# Altium PCB StepCounter_LCD.PcbDoc
Units mm, origin at the board's own origin, x right, y up, seen from the top; angles counter-clockwise.
Board outline 90.93 x 66.29 mm, 2 copper layers (Top Layer, Bottom Layer); 24 components, 24 nets, 105 pads, 19 vias.
Unrouted connection lines stored in the file: 1.
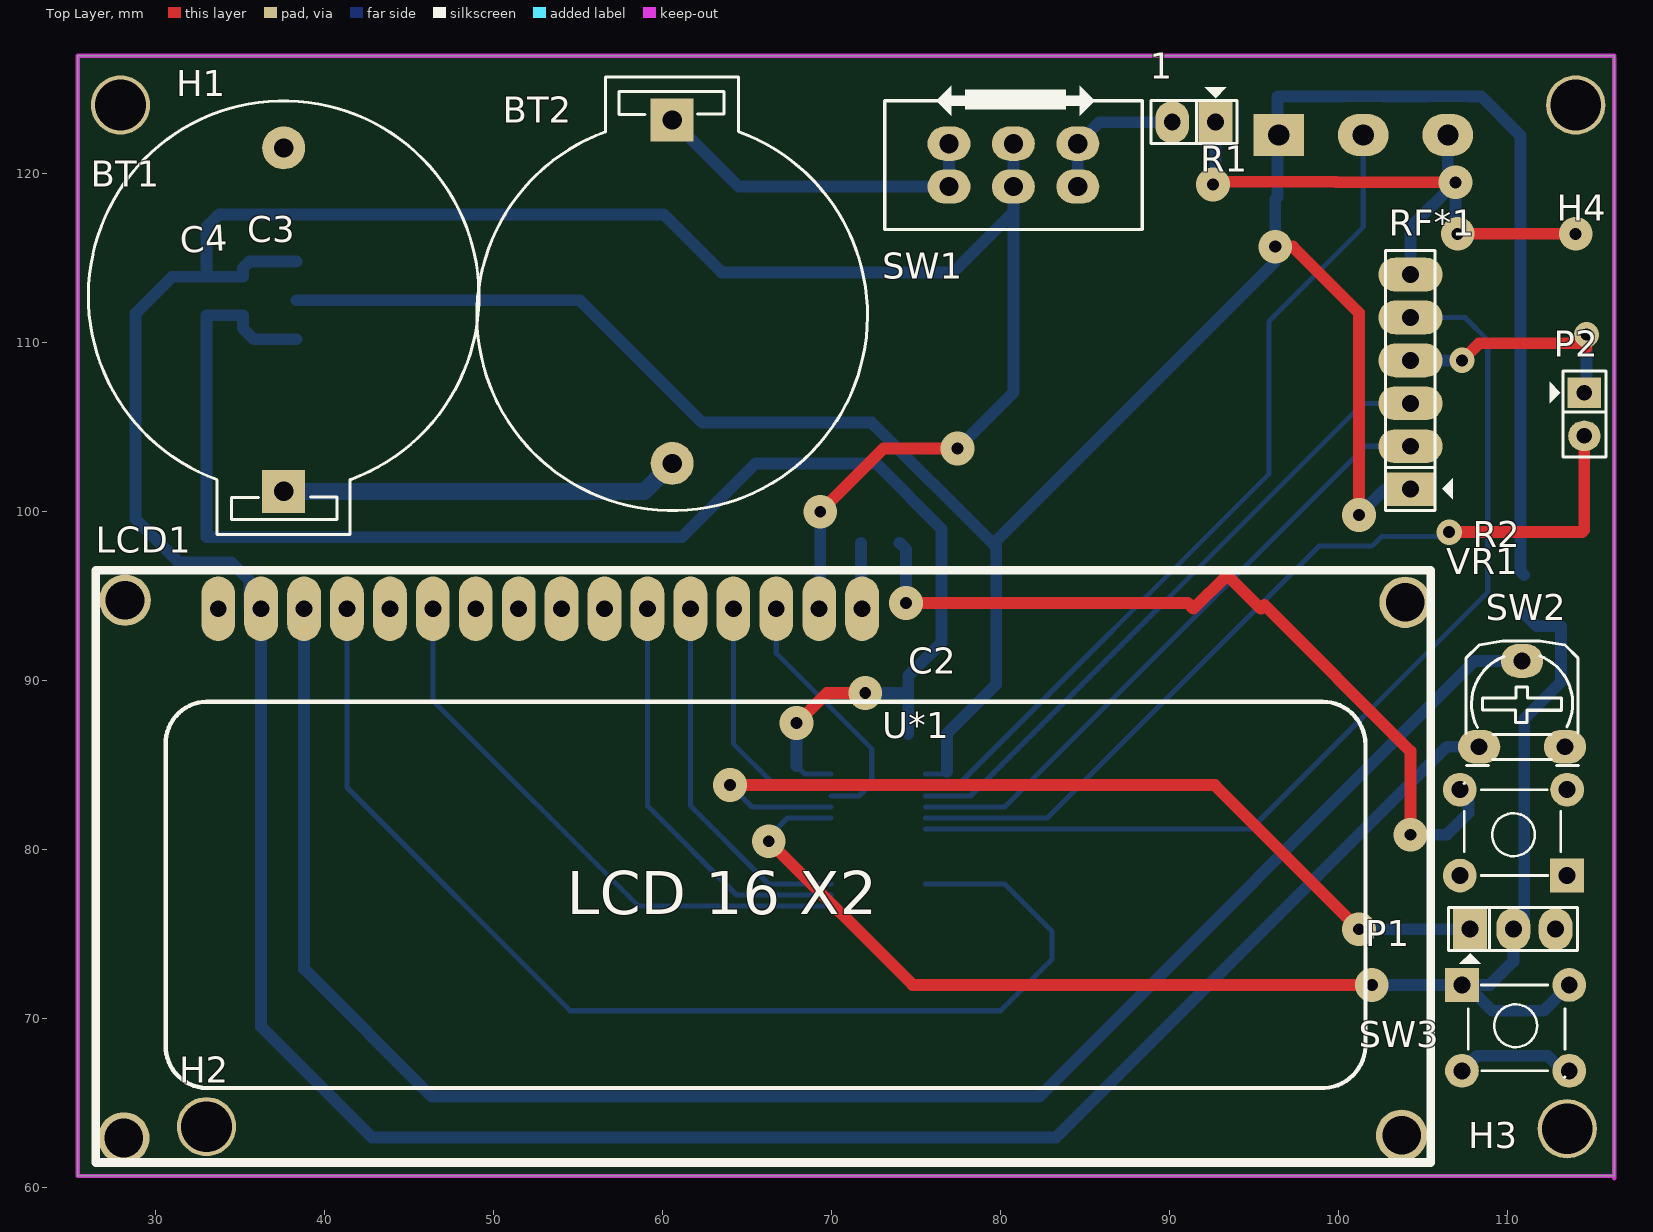
[diagram p0: Top Layer view]
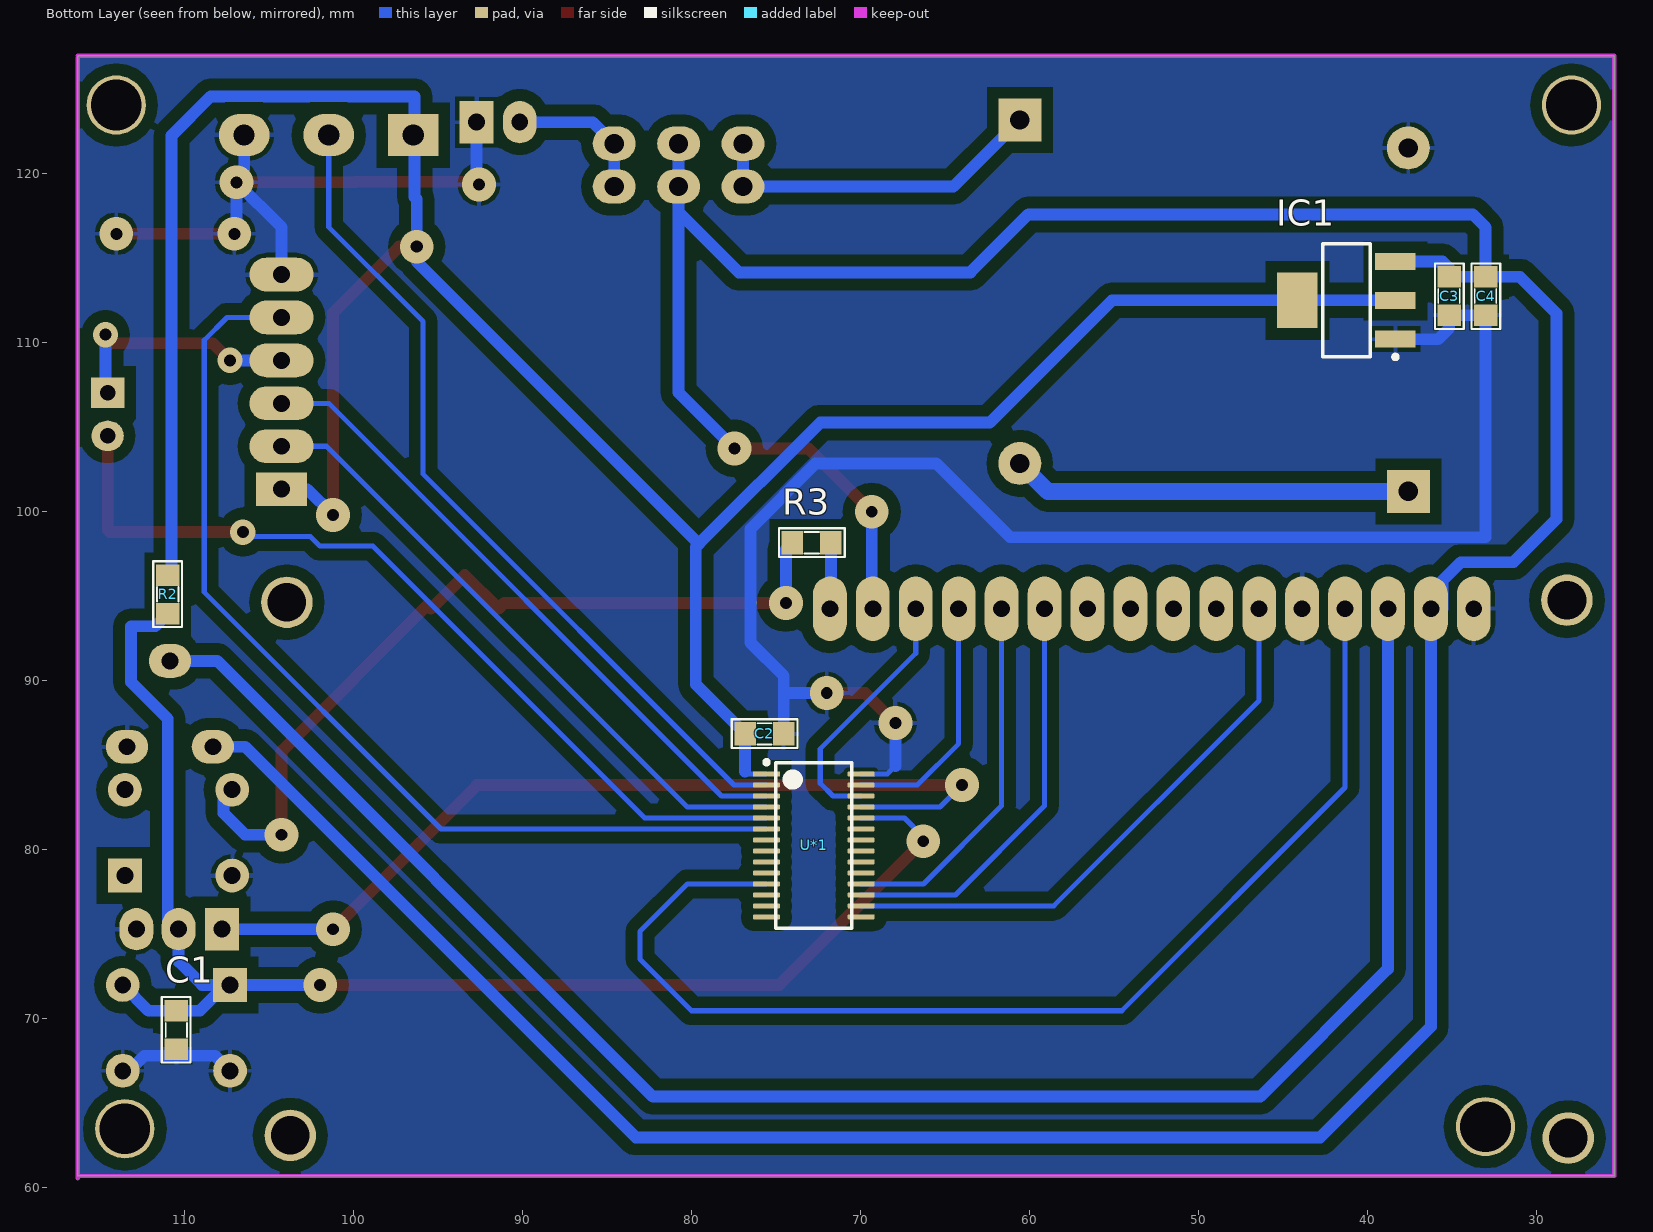
[diagram p1: Bottom Layer view, seen from below]
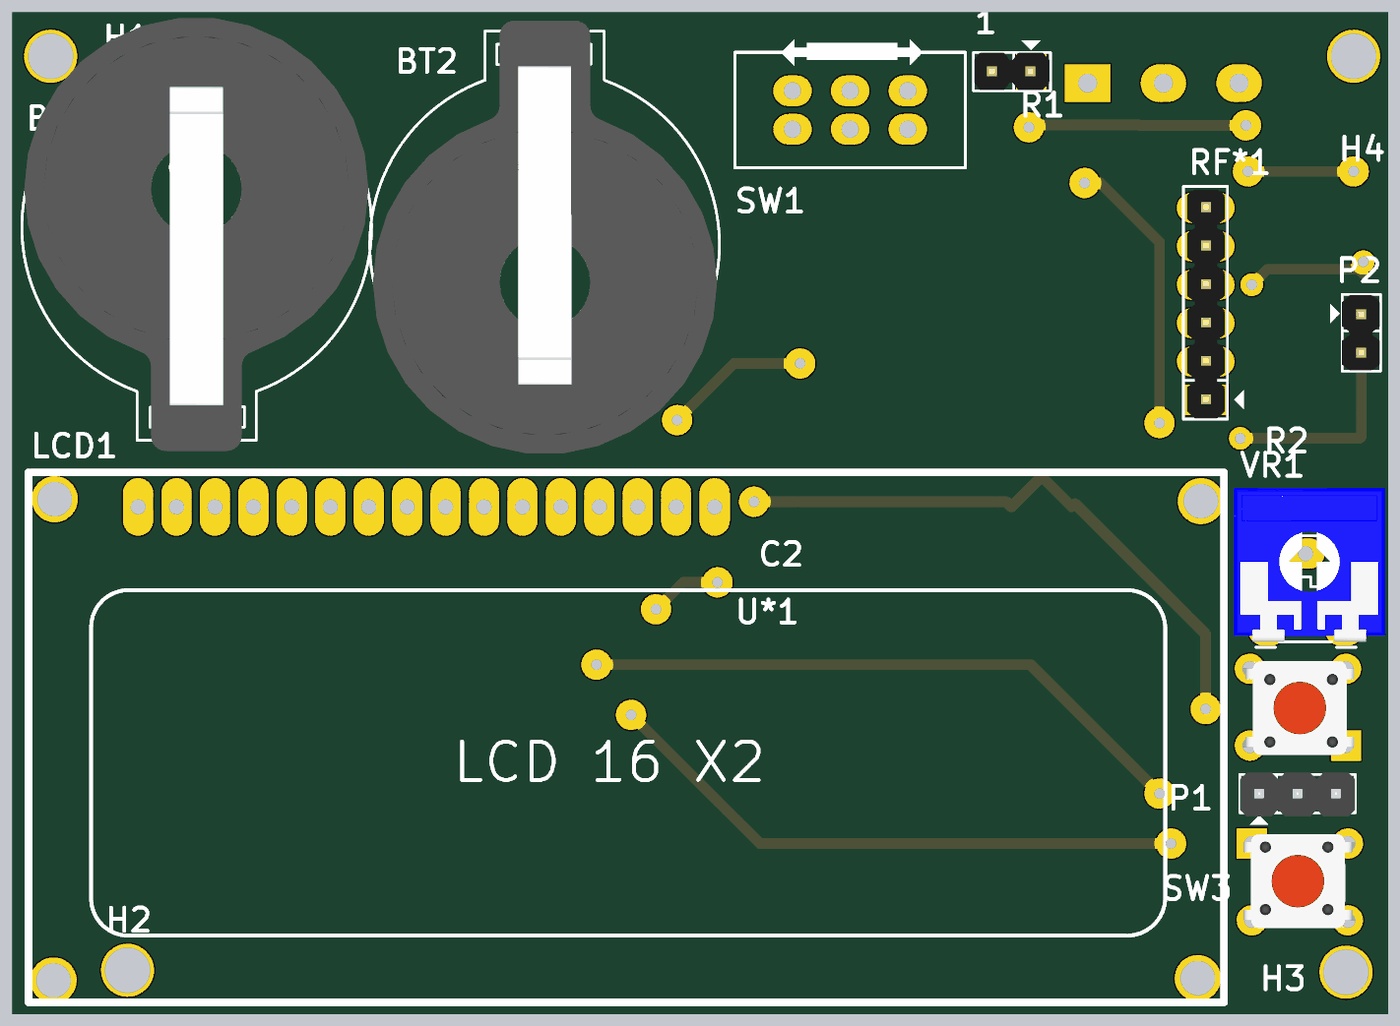
[diagram p2: 3D render of the assembled board from above, using the file's embedded part models]
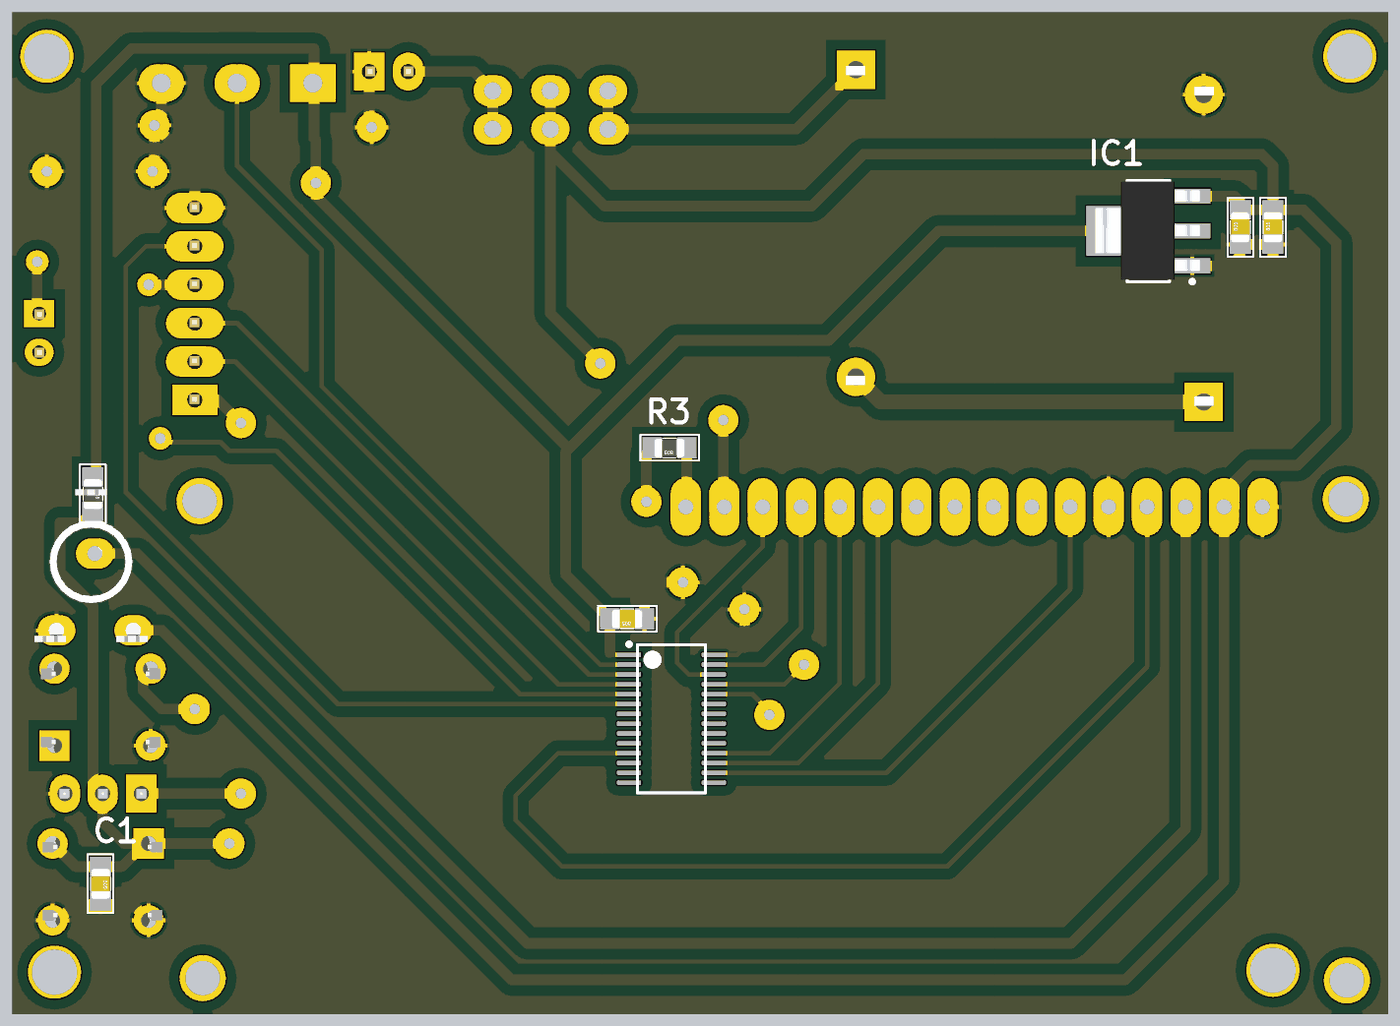
[diagram p3: 3D render of the assembled board from below, using the file's embedded part models]

## Layer stack, top to bottom
Top Solder: solder mask 0.0102, Solder Resist, Dk 3.5
Top Layer: signal copper 0.0356
Dielectric 1: dielectric 0.32, FR-4, Dk 4.8
Bottom Layer: signal copper 0.0356
Bottom Solder: solder mask 0.0102, Solder Resist, Dk 3.5

## Board outline
25.4,60.706 25.4,127 116.332,127 116.332,60.706

## Design rules (kind name [scope] priority, off if disabled: settings)
Clearance [All] p1: gap=0.7 ignorepadtopadclearanceinfootprint=FALSE
PolygonConnect [All] p1: connectstyle=Relief reliefconductorwidth=0.254 reliefentries=4 polygonreliefangle="90 Angle" airgapwidth=0.254
RoutingVias [All] p1: holewidth=0.711 width=1.27 viastyle="Through Hole" minholewidth=0.711 minwidth=1.27 maxholewidth=0.711 maxwidth=1.27
SolderMaskExpansion [All] p1: expansion=0.102
Width [All] p1: maxlimit=0.7 minlimit=0.7 preferedwidth=0.7 minimp=50.000000 maximp=50.000000 favimp=50.000000
30 further rules are at their usual default settings.

## Components (designator, comment, footprint, x,y, rotation, side; value= is the part's Value field where it differs from the comment)
1 "Header 2" JP2#1 92.735,123.063 r180 top
BT1 "PIN 3V" PIN3V 37.592,101.219 r90 top (schematic designator BT2)
BT2 "PIN 3V" PIN3V 60.579,123.19 r270 top (schematic designator BT1)
C1 "Cap Non-Pol SMD" CAP-SM-0805 110.49,70.485 r270 bottom value=1nF (schematic designator C4)
C2 "Cap Non-Pol SMD" CAP-SM-0805 74.549,86.868 r0 bottom value=100pF (schematic designator C3)
C3 "Cap Non-Pol SMD" CAP-SM-0805 35.179,111.633 r90 bottom value=22uF (schematic designator C1)
C4 "Cap Non-Pol SMD" CAP-SM-0805 33.02,111.633 r90 bottom value=100pF (schematic designator C2)
H1 "Hole" "LO KHOAN 3MM" 27.94,124.079 r0 top
H2 "Hole" "LO KHOAN 3MM" 33.02,63.627 r0 top (schematic designator H4)
H3 "Hole" "LO KHOAN 3MM" 113.538,63.5 r0 top
H4 "Hole" "LO KHOAN 3MM" 114.046,124.079 r0 top (schematic designator H2)
IC1 "LM1117" SOT223-4N 41.254,112.522 r0 bottom value=LM317
LCD1 "LCD16x2" LCD_16x2 66.04,78.867 r0 top (schematic designator LCD)
P1 "Header 3" JP3 110.338,75.311 r0 top (schematic designator P2)
P2 "Header 2" JP2#2 114.554,107.061 r270 top (schematic designator P5)
R1 "RSBK10" REBK10 96.469,122.301 r0 top (schematic designator R6)
R2 "RESISTOR SMD" RES-SM-0805 110.998,96.266 r270 bottom value=47k (schematic designator R4)
R3 "RESISTOR SMD" RES-SM-0805 71.755,98.171 r0 bottom value=1K
RF*1 "LC12S" JP6 104.267,101.346 r90 top
SW1 "SWDPDT" SWDPDT_1.5X1 76.962,121.793 r0 top (schematic designator SW2)
SW2 "SW" "Tact SW 4 pin" 113.538,78.486 r180 top value="Button chip 4 pin" (schematic designator SW1)
SW3 "SW" "Tact SW 4 pin" 107.315,72.009 r0 top value="Button chip 4 pin" (schematic designator SW1)
U*1 "MSP430G2553" MSP430G2553TSSTOP 72.771,80.264 r180 bottom
VR1 "10K" VR 108.331,86.106 r0 top value="VR 10K"

## Footprints (in the part's own frame and the unit in brackets; to place one, negate y for a bottom-side part, rotate by r counter-clockwise, add the part's x,y. Pads: shape width x height; smd on the part's side, far side on the other; paste and mask are expansions set on the pad)
CAP-SM-0805 [mil]
  rect 50x55 smd: 1(0,0) 2(90,0)
  silkscreen extent -32,-34 121,33, body extent 6,-25 84,25, height 31
JP2#1 [mm]
  rect 2x2.5 hole 1: 1(0,0)
  oval 2x2.5 hole 1: 2(2.565,0)
  silkscreen extent -1.27,-2.06 3.81,1.27, body extent -1.22,-1.27 3.76,1.23, height 8.22
JP2#2 [mm]
  rect 1.8x2 hole 0.914: 1(0,0)
  oval 1.8x1.905 hole 0.914: 2(2.565,0)
  silkscreen extent -1.27,-2.06 3.81,1.27, body extent -1.22,-1.27 3.76,1.23, height 8.22
JP3 [mm] "Jumper 3"
  rect 2x2.5 hole 1: 1(-2.54,0)
  oval 2x2.5 hole 1: 2(0.025,0) 3(2.515,0)
  silkscreen extent -3.81,-2.06 3.81,1.27, body extent -3.81,-1.52 3.81,1.4, height 9.02
JP6 [mm] "JP6"
  rect 2x3 hole 1: 1(0,0)
  oval 2x3.81 hole 1: 2(2.54,0) 3(5.08,0) 4(7.62,0) 5(10.16,0) 6(12.7,0)
  silkscreen extent -1.27,-2.51 14.12,1.47, body extent -1.22,-1.27 13.92,1.23, height 8.22
LCD_16x2 [mil] "Test"
  round 120 hole 90: 0(-1492.5,-626.52) 0(-1489.51,626.52) 0(1484.51,-620.49) 0(1492.5,621.5)
  oval 78.74x150 hole 39.37: 1(-1272.5,606.5) 2(-1172.5,606.5) 3(-1072.5,606.5) 4(-972.5,606.5) 5(-872.5,606.5) 6(-772.5,606.5) 7(-672.5,606.5) 8(-572.5,606.5) 9(-472.5,606.5) 10(-372.5,606.5) 11(-272.5,606.5) 12(-172.5,606.5) 13(-72.5,606.5) 14(27.5,606.5) 15(127.5,606.5) 16(227.5,606.5)
  silkscreen extent -1558,-684 1552,696
"LO KHOAN 3MM" [mil]
  round 138 hole 118.1: 1(0,0)
MSP430G2553TSSTOP [mm] "TSOP, 28-Leads, Body 9.70x4.40mm, Pitch 0.65mm, IPC Medium Density"
  rect 1.6x0.3 smd: 1(-2.8,4.225)
  rrect50% 1.6x0.3 smd: 2(-2.8,3.575) 3(-2.8,2.925) 4(-2.8,2.275) 5(-2.8,1.625) 6(-2.8,0.975) 7(-2.8,0.325) 8(-2.8,-0.325) 9(-2.8,-0.975) 10(-2.8,-1.625) 11(-2.8,-2.275) 12(-2.8,-2.925) 13(-2.8,-3.575) 14(-2.8,-4.225) 15(2.8,-4.225) 16(2.8,-3.575) 17(2.8,-2.925) 18(2.8,-2.275) 19(2.8,-1.625) 20(2.8,-0.975) 21(2.8,-0.325) 22(2.8,0.325) 23(2.8,0.975) 24(2.8,1.625) 25(2.8,2.275) 26(2.8,2.925) 27(2.8,3.575) 28(2.8,4.225)
  silkscreen extent -2.93,-4.9 2.25,5.05, body extent -2.25,-4.9 2.25,4.9, height 1.2
PIN3V [mil] "Socket PIN 3V"
  rect 100x100 hole 45: 1(0,0)
  round 100 hole 45: 2(800,0)
  silkscreen extent -100,-455 910,455, body extent -128,-447 1002,449, height 278
REBK10 [mm]
  rect 3x2.5 hole 1.25: 1(0,0)
  oval 3x2.5 hole 1.25: 2(5.004,0) 3(10.008,0)
RES-SM-0805 [mil]
  rect 50x55 smd: 1(0,0) 2(90,0)
  silkscreen extent -32,-34 121,33, body extent 6,-25 84,25, height 31
SOT223-4N [mm] "SOT223, 4-Leads, Body 6.5x3.5mm, Pitch 2.3mm, Lead Span 7mm, IPC Medium Density"
  rect 2.4x1 smd: 1(-2.9,2.3) 2(-2.9,0) 3(-2.9,-2.3)
  rect 2.4x3.3 smd: 4(2.9,0)
  silkscreen extent -3.02,-3.35 1.4,3.47, body extent -3.39,-3.27 3.5,3.23, height 1.72
SWDPDT_1.5X1 [mil] "Switch DPDT, Pin to Pin 150mil, Row to Row 100mil"
  oval 100x80 hole 45: 1(0,-100) 1(0,0) 2(150,-100) 2(150,0) 3(300,-100) 3(300,0)
  silkscreen extent -150,-200 450,135
"Tact SW 4 pin" [mm] "SW button 4pin, 250 x250 mil"
  rect 2x2 hole 1: 1(0,0)
  round 2 hole 1: 2(6.35,-5.08) 3(6.35,0) 4(0,-5.08)
  silkscreen extent 0.38,-5.46 6.1,0, body extent -0.9,-5.59 7,0.61, height 7
VR [mm] "Resistor Variable"
  oval 2.5x2 hole 1: 1(0,0) 2(2.54,5.08) 3(5.08,0)
  silkscreen extent -0.79,-1.12 5.87,6.25, body extent -2.21,-0.76 7.79,9.44, height 4.2

## Part data
1 P2: "Header, 2-Pin", LatestRevisionDate=17-Jul-2002, LatestRevisionNote="Re-released for DXP Platform.", Publisher="Altium Limited"
BT1 BT2: "Battery 3VDC"
C1 C2 C3 C4: "Capacitor"
H1 H2 H3 H4: "Hole 3mm"
IC1: "Available in 1.8V, 2.5V, 2.85V, 3.3V, 5V, and  Adjustable Versions"
P1: "Header, 3-Pin", LatestRevisionDate=17-Jul-2002, LatestRevisionNote="Re-released for DXP Platform.", Publisher="Altium Limited"
R2 R3: "Resistor"
SW1: "Switch SPDT", Creat by=VanDungEvn@Gmail.com
SW2 SW3: library part "Tact SW - 4Pin", "Switch button 4 pin"
VR1: library part VR, "Var Resistor"

## Via types
v1: diameter 2, hole 0.7, Top Layer to Bottom Layer, 10 vias
v2: diameter 2, hole 0.711, Top Layer to Bottom Layer, 6 vias
v3: diameter 1.5, hole 0.711, Top Layer to Bottom Layer, 3 vias

## Nets (pads, with @x,y where several pads share a name; then routed paths per layer and width w, separated by ;. In a path a pad name is that pad's centre, name@x,y a point inside that pad or via, vN(x,y) a via of type N, cw(c..) or ccw(c..) an arc to the next point about the centre after c; other vN are vias at no path point)
3V3: C2.2 IC1.2 IC1.4 R1.1 R2.1 RF*1.1 U*1.1 | length 160.7
  Top Layer w0.7: v2(96.266,115.697) 97.307,115.697 101.219,111.785 v1(101.219,99.822)
  Bottom Layer w0.3: U*1.1 76.996,84.489 76.835,84.65
  Bottom Layer w0.7: IC1.2 IC1.4 55.118,112.522 62.357,105.283 72.39,105.283 79.566,98.108 ; 76.835,84.65 C2.2 79.756,89.789 79.756,97.917 79.566,98.108 ; v1(101.219,99.822) 102.743,101.346 RF*1.1 ; R2.1 110.778,96.486 110.778,122.267 108.458,124.587 107.693,124.587 107.679,124.601 105.274,124.601 105.26,124.587 102.69,124.587 102.676,124.601 100.27,124.601 100.256,124.587 96.393,124.587 96.393,118.643 96.266,118.516 v2(96.266,115.697) 96.266,114.808 79.566,98.108
5v: C3.2 C4.2 IC1.3 LCD1.2 LCD1.15 SW1.2 VR1.1 | length 231.7
  Top Layer w0.7: v1(69.342,100.013) 73.088,103.759 v1(77.47,103.759)
  Bottom Layer w0.7: IC1.3 35.574,114.822 35.179,114.427 C3.2 C4.2 ; LCD1.15 69.342,94.336 v1(69.342,100.013) ; v1(77.47,103.759) 80.772,107.061 80.772,117.729 ; SW1.2@80.772,121.793 80.772,119.253 80.772,117.729 ; VR1.1 106.426,86.106 83.312,62.992 42.799,62.992 36.258,69.532 LCD1.2 35.569,94.272 35.569,95.943 34.485,97.027 31.37,97.027 28.829,99.568 28.829,111.76 30.988,113.919 C4.2 ; C4.2 33.02,116.84 33.782,117.602 60.071,117.602 63.5,114.173 77.216,114.173 80.772,117.729
CS: RF*1.5 U*1.6 | length 59.1
  Bottom Layer w0.3: U*1.6 94.828,81.239 108.839,95.25 108.839,110.16 107.493,111.506 RF*1.5
GND: 1.1 BT1.2 C1.2 C2.1 C3.1 C4.1 IC1.1 LCD1.1 LCD1.5 P1.3 R1.3 RF*1.6 SW2.3 SW3.2 SW3.4 U*1.28 VR1.3 | length 136.4
  Top Layer w0.7: v1(67.945,87.503) 69.723,89.281 v1(72.009,89.281) ; v2(92.583,119.38) 92.739,119.536 99.831,119.536 99.861,119.507 99.886,119.532 99.911,119.507 v2(106.934,119.507) ; v2(107.061,116.459) v2(114.046,116.459)
  Bottom Layer w0.3: 67.945,84.963 68.419,84.489 U*1.28
  Bottom Layer w0.7: IC1.1 35.828,110.222 35.179,110.871 C3.1 C4.1 33.02,98.499 61.161,98.499 65.532,102.87 72.644,102.87 76.526,98.988 76.526,92.274 74.549,90.297 74.549,89.154 ; 67.945,84.963 v1(67.945,87.503) ; v1(72.009,89.281) 74.422,89.281 74.549,89.154 ; C2.1 74.549,89.154 ; v2(92.583,119.38) 92.735,119.532 1.1 ; RF*1.6 104.267,116.84 v2(106.934,119.507) ; R1.3 106.477,119.964 v2(106.934,119.507) ; v2(107.061,116.459) 106.934,116.586 v2(106.934,119.507) ; SW3.4 108.204,67.818 112.395,67.818 113.284,66.929 SW3.2
Net_2: 1.2 SW1.3 | length 8.7
  Bottom Layer w0.7: SW1.3@84.582,119.253 84.582,121.793 85.852,123.063 1.2
NetBT1_1: BT2.1 SW1.1 | length 20.6
  Bottom Layer w0.7: BT2.1 64.516,119.253 76.962,119.253 SW1.1@76.962,121.793
NetBT1_2: BT1.1 BT2.2 | length 23.7
  Bottom Layer w1: BT1.1 58.928,101.219 BT2.2
NetLCD_3: LCD1.3 VR1.2 | length 107.2
  Bottom Layer w0.7: LCD1.3 38.798,72.962 46.355,65.405 82.296,65.405 108.077,91.186 VR1.2
NetLCD_16: LCD1.16 R3.1 | length 4.2
  Bottom Layer w0.7: R3.1 71.755,94.336 LCD1.16 LCD1.16@72.034,94.488
NetP5_1: P2.1 RF*1.4 | length 15.4
  Top Layer w0.7: v3(107.315,108.966) 108.331,109.982 114.427,109.982 114.681,109.728 v3(114.681,110.49)
  Bottom Layer w0.7: RF*1.4 v3(107.315,108.966) ; P2.1 114.535,107.08 114.935,107.479 114.681,107.733 v3(114.681,110.49)
NetR3_2: R3.2 SW2.2 | length 49.8
  Top Layer w0.7: v2(74.422,94.615) 91.084,94.615 91.427,94.272 93.421,96.266 95.415,94.272 95.631,94.488 104.267,85.852 v1(104.267,80.899)
  Bottom Layer w0.3: v2(74.422,94.615) 74.079,94.615 v2@74.422,94.958
  Bottom Layer w0.7: R3.2 74.422,97.79 v2@74.422,94.958 ; v1(104.267,80.899) 106.426,80.899 107.696,82.169 SW2.2@107.696,83.566
NetR6_2: R1.2 U*1.2 | length 50.3
  Bottom Layer w0.3: U*1.2 77.489,83.839 95.885,102.235 95.885,111.264 101.473,116.852 R1.2
P2.0: U*1.10
P2.1: LCD1.4 U*1.11 | length 69.3
  Bottom Layer w0.3: LCD1.4 41.338,83.693 54.546,70.485 80.01,70.485 83.058,73.533 83.058,75.184 80.253,77.989 U*1.11
P2.3: LCD1.6 U*1.16 | length 34
  Bottom Layer w0.3: LCD1.6 46.419,88.837 58.566,76.689 U*1.16
P2.4: LCD1.11 U*1.17 | length 24.7
  Bottom Layer w0.3: LCD1.11 59.118,82.614 64.393,77.339 U*1.17
P2.5: LCD1.12 U*1.18 | length 21.9
  Bottom Layer w0.3: LCD1.12 61.658,82.614 66.283,77.989 U*1.18
P2.6: LCD1.13 U*1.27 | length 14.8
  Bottom Layer w0.3: LCD1.13 64.198,86.285 66.645,83.839 U*1.27
P2.7: LCD1.14 U*1.26 | length 15.4
  Bottom Layer w0.3: LCD1.14 66.739,91.63 72.39,85.979 72.39,83.947 71.632,83.189 U*1.26
RESET: C1.1 P1.2 R2.2 SW3.1 SW3.3 U*1.24 | length 83.8
  Top Layer w0.7: v1(66.294,80.518) 74.803,72.009 v1(101.981,72.009)
  Bottom Layer w0.3: v1(66.294,80.518) 66.294,80.772 67.411,81.889 U*1.24
  Bottom Layer w0.7: v1@101.346,72.009 v1(101.981,72.009) SW3.1 SW3.1@107.569,72.009 ; P1.2 110.363,73.406 108.966,72.009 SW3.1@107.569,72.009 ; P1.2@110.998,75.311 110.998,87.757 113.171,89.93 113.171,93.236 111.742,93.236 R2.2 ; SW3.3 112.141,70.485 C1.1 109.093,70.485 SW3.1@107.569,72.009
Rx: RF*1.3 U*1.3 | length 38.3
  Bottom Layer w0.3: U*1.3 78.236,83.189 101.473,106.426 RF*1.3
SET: P2.2 U*1.5 | length 51.6
  Top Layer w0.7: v3(106.553,98.806) 114.427,98.806 114.554,98.933 P2.2
  Bottom Layer w0.3: U*1.5 82.778,81.889 98.861,97.972 101.985,97.972 102.565,98.552 106.299,98.552 v3(106.553,98.806)
TEST: P1.1 U*1.25 | length 54.5
  Top Layer w0.7: v1(64.008,83.839) 92.691,83.839 v1(101.219,75.311)
  Bottom Layer w0.3: v1(64.008,83.839) 65.308,82.539 U*1.25
  Bottom Layer w0.7: v1(101.219,75.311) P1.1@108.433,75.311
Tx: RF*1.2 U*1.4 | length 37.5
  Bottom Layer w0.3: U*1.4 80.253,82.539 101.6,103.886 RF*1.2
pads on no net: H1.1 H2.1 H3.1 H4.1 LCD1.0 LCD1.7 LCD1.8 LCD1.9 LCD1.10 SW2.1 SW2.4 U*1.7 U*1.8 U*1.9 U*1.12 U*1.13 U*1.14 U*1.15 U*1.19 U*1.20 U*1.21 U*1.22 U*1.23
copper on no net: | length 0.2
  Top Layer w0.7: 71.882,89.408 72.009,89.281

## Polygon pours and split planes (outlines as drawn)
GND on Bottom Layer "GND_L02_P016" (solid, pour order 16): 25.4,127 116.332,127 116.332,60.706 25.4,60.706
GND on Bottom Layer "GND_L02_P008" (solid, pour order 8): 25.527,127

## Keep-outs
Keep-Out Layer:
  lines w0.254: 116.332,60.579 116.332,126.873 ; 116.332,60.706 25.4,60.706 25.4,127 116.332,127

## Text inside footprints (layer, text, board x,y; h text height)
LCD1: Top Overlay "LCD 16 X2" at 54.356,76.2 h2.54